# Altium PCB weather station SCH.PcbDoc
Units mm, origin at the board's own origin, x right, y up, seen from the top; angles counter-clockwise.
Board outline 52 x 23 mm, 2 copper layers (Top Layer, Bottom Layer), stack 1.571 mm thick; 37 components, 21 nets, 157 pads, 36 vias.
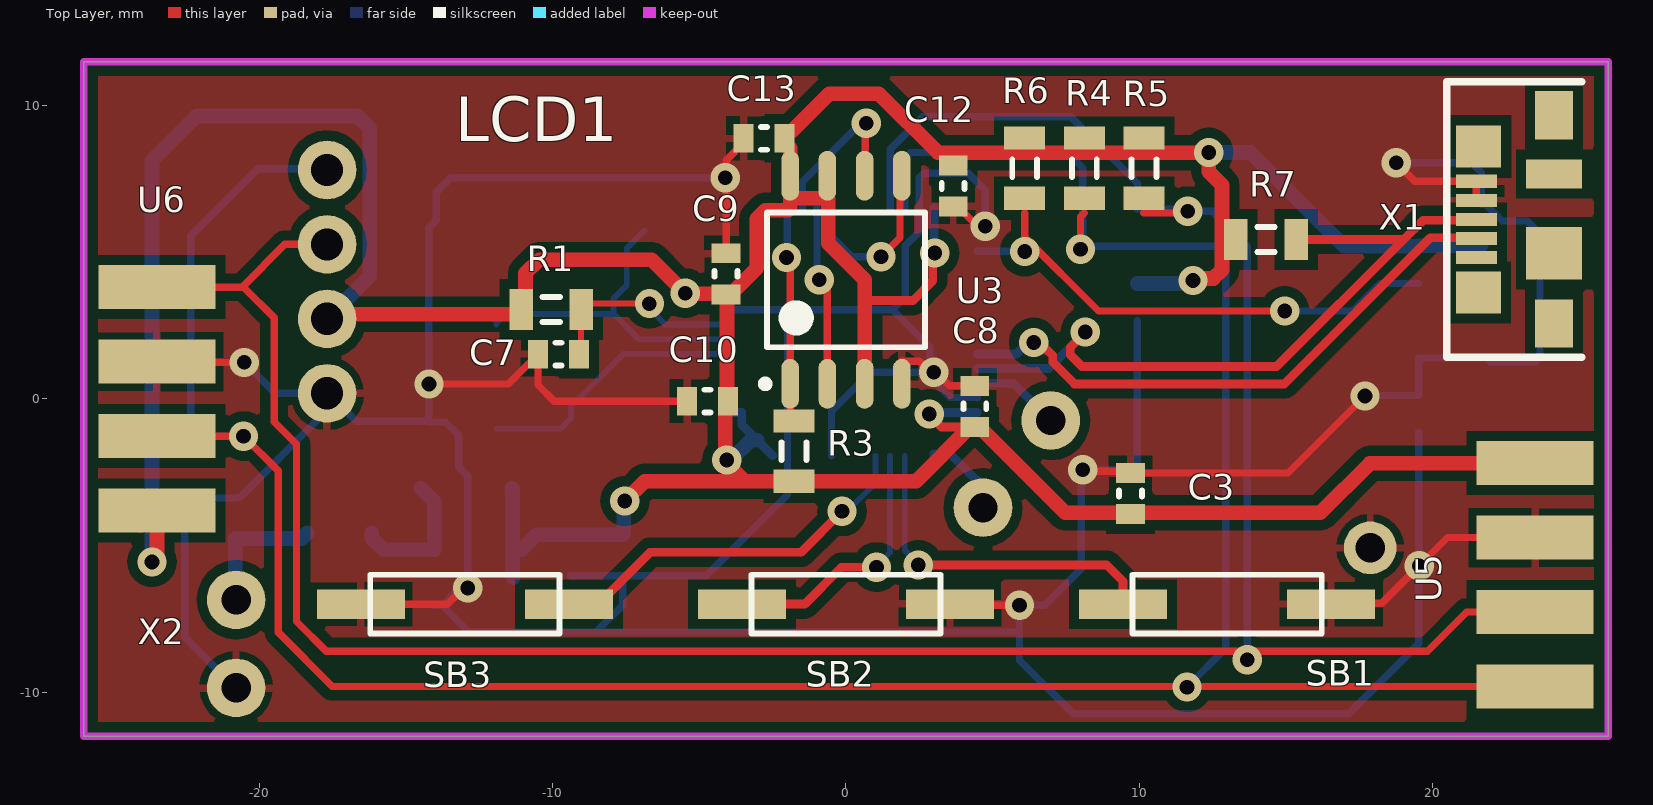
[diagram p0: Top Layer view]
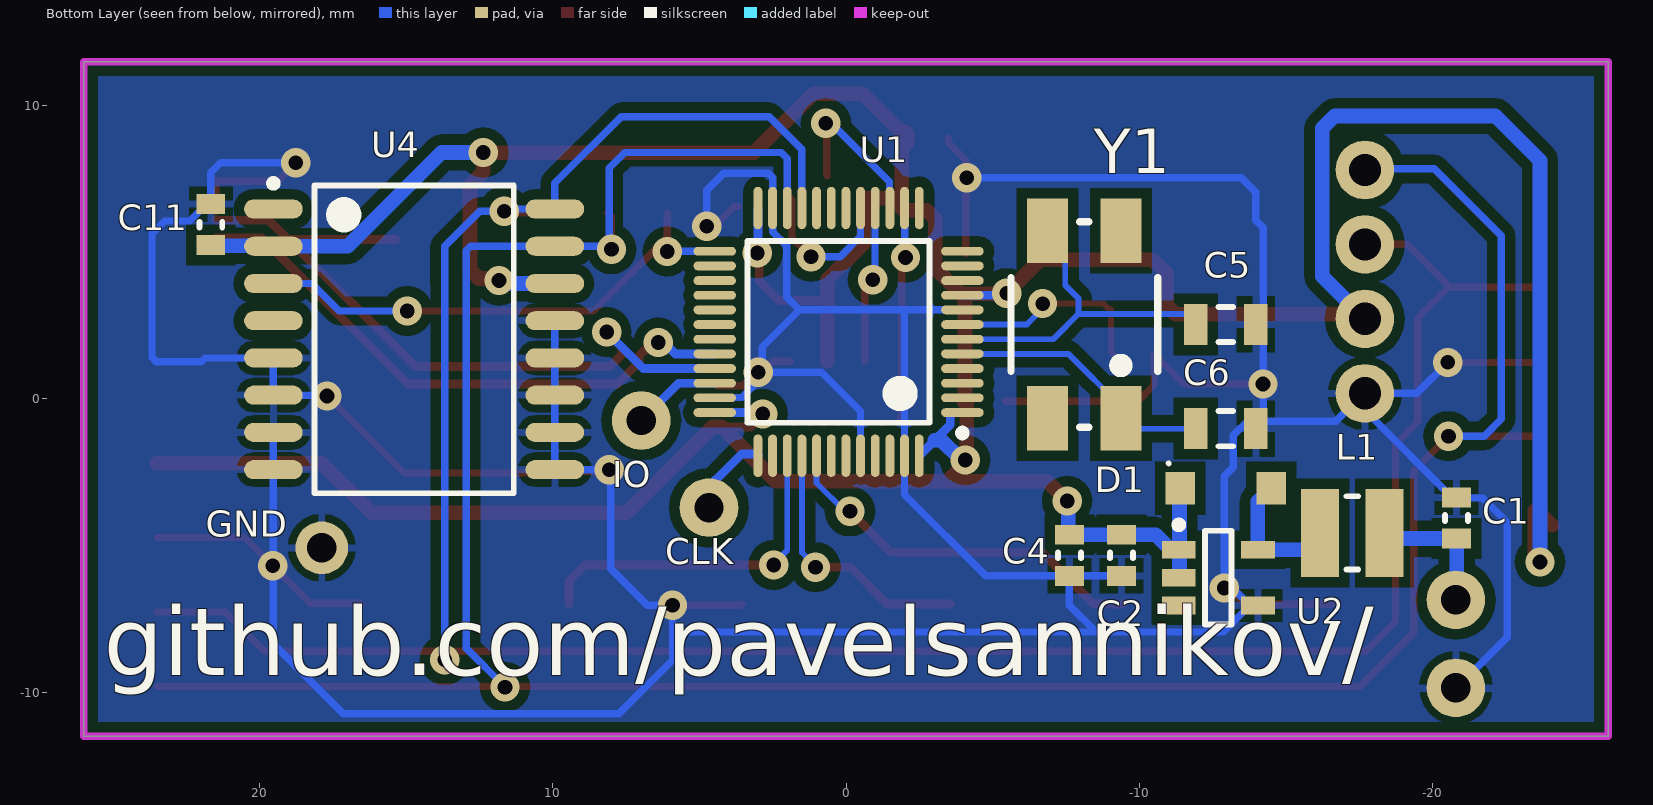
[diagram p1: Bottom Layer view, seen from below]
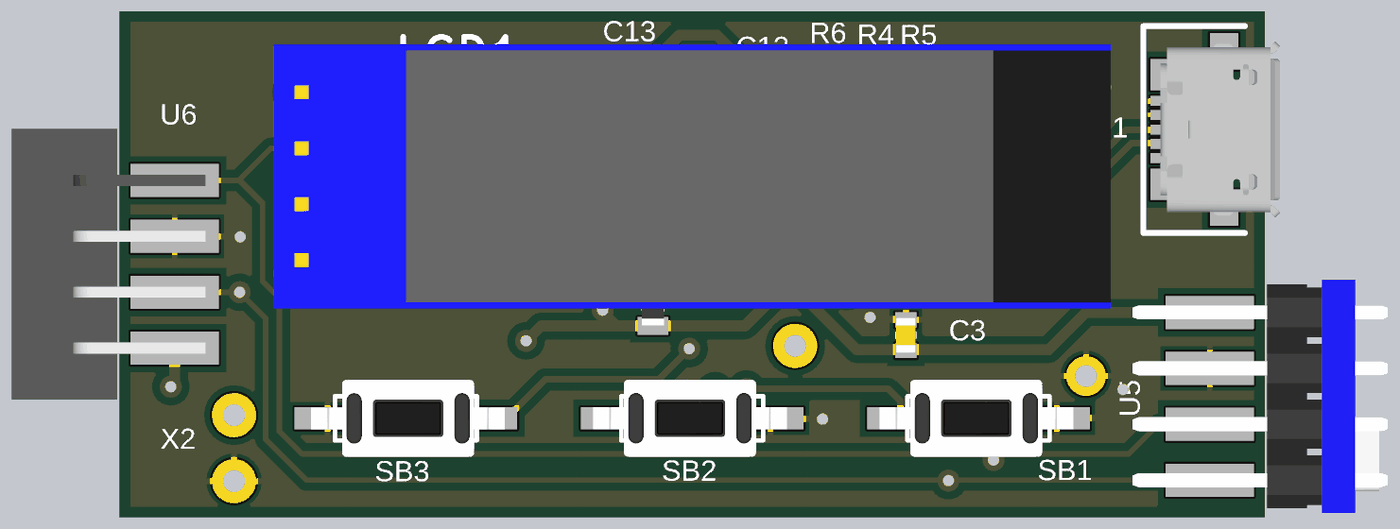
[diagram p2: 3D render of the assembled board from above, using the file's embedded part models]
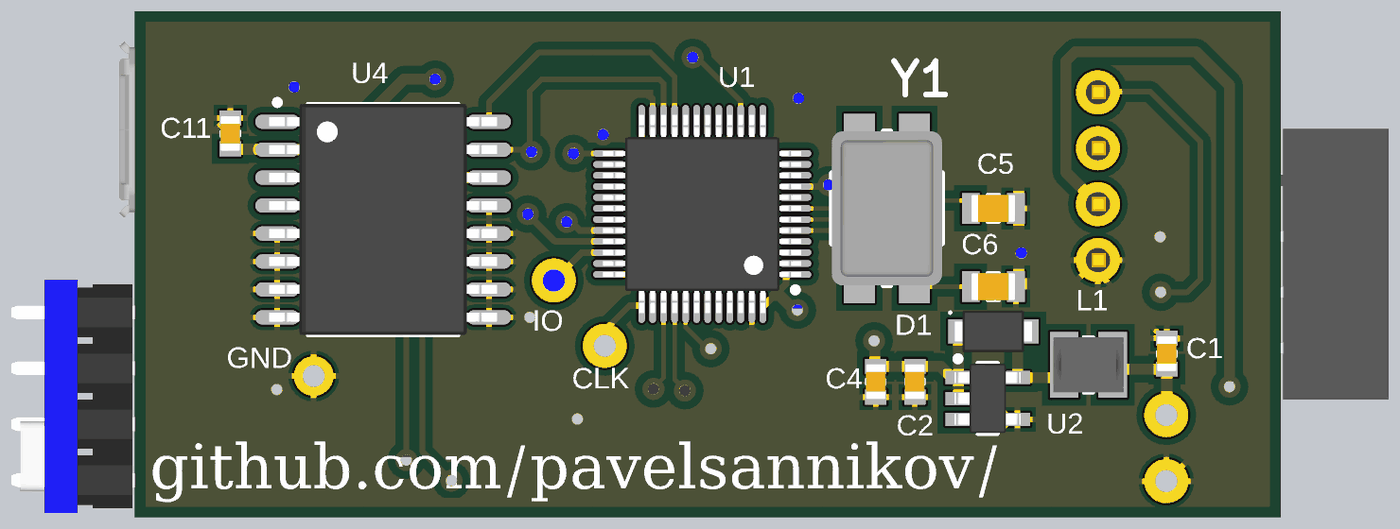
[diagram p3: 3D render of the assembled board from below, using the file's embedded part models]

## Layer stack, top to bottom
Top Solder: solder mask 0.0102, Solder Resist, Dk 3.5
Top Layer: signal copper 0.0356
Dielectric 1: dielectric 1.5, FR-4, Dk 4.8
Bottom Layer: signal copper 0.0356
Bottom Solder: solder mask 0.0102, Solder Resist, Dk 3.5

## Board outline
-26,-11.5 -26,11.5 26,11.5 26,-11.5

## Design rules (kind name [scope] priority, off if disabled: settings)
Clearance [IsRegion] p1: gap=0.35 ignorepadtopadclearanceinfootprint=FALSE
Clearance Clearance_1 [All] p2: gap=0.2 ignorepadtopadclearanceinfootprint=FALSE
DiffPairsRouting [All] p1: maxlimit=0.3 minlimit=0.2 mostfreqgap=0.3 toplayer_minwidth=0.2 toplayer_maxwidth=0.381 toplayer_prefwidth=0.3 bottomlayer_minwidth=0.2 bottomlayer_maxwidth=0.381 bottomlayer_prefwidth=0.3 maxuncoupledlength=12.7
PlaneConnect [All] p1: pad.planeconnectstyle=Relief pad.reliefexpansion=0.508 pad.reliefentries=4 pad.reliefconductorwidth=0.254 pad.reliefairgap=0.254 via.planeconnectstyle=Direct via.reliefexpansion=0.508 via.reliefentries=4 via.reliefconductorwidth=0.254 via.reliefairgap=0.254
PolygonConnect [All] p1: thpad.connectstyle=Relief thpad.reliefconductorwidth=0.254 thpad.reliefentries=4 thpad.polygonreliefangle="90 Angle" thpad.airgapwidth=0.254 smdpad.connectstyle=Relief smdpad.reliefconductorwidth=0.254 smdpad.reliefentries=4 smdpad.polygonreliefangle="90 Angle" smdpad.airgapwidth=0.254 via.connectstyle=Direct via.reliefconductorwidth=0.254 via.reliefentries=4 via.polygonreliefangle="90 Angle" via.airgapwidth=0.254
RoomDefinition "weather station PCB" [InComponentClass('weather station PCB')] p1 off: confinementstyle=ConfineIn formatcopy=TRUE lockcomponents=FALSE outline -57.318,-18.383 104.785,-18.383 104.785,16.059 -57.318,16.059
RoutingVias [All] p1: holewidth=0.711 width=1.27 viastyle="Through Hole" minholewidth=0.5 minwidth=1 maxholewidth=0.711 maxwidth=1.27
SolderMaskExpansion [All] p1: expansion=0.102 istentingtop=FALSE
Width [All] p1: maxlimit=2 minlimit=0.2 preferedwidth=0.254
28 further rules are at their usual default settings.

## Classes and differential pairs
differential pair USB: +USB_P -USB_N

## Components (designator, comment, footprint, x,y, rotation, side; value= is the part's Value field where it differs from the comment)
C1 "Capacitor" C0603 -20.828,-4.064 r270 bottom value="22 uF"
C2 "Capacitor" C0603 -9.398,-5.334 r90 bottom value="22 uF"
C3 "Capacitor" C0603 9.703,-3.226 r270 top value="22 uF"
C4 "Capacitor" C0603 -7.62,-5.334 r90 bottom value="22 uF"
C5 "Capacitor" C0805 -12.954,2.54 r0 bottom value=20pF
C6 "Capacitor" C0805 -12.954,-1.016 r0 bottom value=20pF
C7 "Capacitor" C0603 -9.804,1.524 r0 top value="0.1 uF"
C8 "Capacitor" C0603 4.394,-0.254 r270 top value="0.1 uF"
C9 "Capacitor" C0603 -4.089,4.267 r270 top value="0.1 uF"
C10 "Capacitor" C0603 -4.724,-0.076 r0 top value="0.1 uF"
C11 "Capacitor" C0603 21.666,5.944 r270 bottom value="0.1 uF"
C12 "Capacitor" C0603 3.658,7.264 r90 top value="0.1 uF"
C13 "Capacitor" C0603 -2.794,8.89 r0 top value="0.1 uF"
CLK "Connector" "1 Hole"#1 4.674,-3.708 r90 bottom
D1 "Diode" SOD123 -12.954,-3.048 r180 bottom
GND "Connector" "1 Hole"#2 17.882,-5.08 r90 bottom
IO "Connector" "1 Hole"#1 6.985,-0.737 r90 bottom
L1 "Inductor" LQH32CN -17.272,-4.572 r0 bottom value="47 uH"
LCD1 "LCD Display" "LCD 0.91inch module" 0,4 r0 top
R1 "Resistor" R0805 -10.058,3.048 r180 top value=10k
R3 "Resistor" R0805 -1.778,-1.778 r270 top value=10k
R4 "Resistor" R0805 8.128,7.874 r90 top value=10k
R5 "Resistor" R0805 10.16,7.874 r90 top value=10k
R6 "Resistor" R0805 6.096,7.874 r90 top value=10k
R7 "Resistor" R0805 14.326,5.436 r180 top value=10k
SB1 "Tact Switch" "Button SMD" 13,-7 r0 top
SB2 "Tact Switch" "Button SMD" 0,-7 r0 top
SB3 "Tact Switch" "Button SMD" -13,-7 r180 top
U1 "STM32F103C8" LQFP-48 0.254,2.286 r0 bottom
U2 "NCP1402" SOT-23-5 -12.7,-6.096 r180 bottom
U3 "Flash memory" SOIC-8 0,4.064 r90 top
U4 "DS3231" SOIC_W16 14.732,2.032 r180 bottom
U5 "Pressure sensor" "BMP180 rotated" 26,-6 r0 top
U6 "AM2320" "AM2320 BENDED" -26,0 r180 top
X1 "Connector" "Micro USB" 21.5,6.121 r90 top
X2 "Connector" "2 Holes" -23.58,-6.81 r180 top
Y1 "Crystal Oscillator" "KX - 13" -8.128,2.54 r90 bottom value="25 MHz"

## Footprints (in the part's own frame and the unit in brackets; to place one, negate y for a bottom-side part, rotate by r counter-clockwise, add the part's x,y. Pads: shape width x height; smd on the part's side, far side on the other; paste and mask are expansions set on the pad)
"1 Hole"#1 [mm] "1mm"
  round 2 hole 1: 1(0,0)
"1 Hole"#2 [mm] "1mm"
  round 1.8 hole 1: 1(0,0)
"2 Holes" [mm]
  round 2 hole 1: 1(-2.777,0.045) 2(-2.777,3.045)
"AM2320 BENDED" [mm]
  rect 4x1.5 smd: GND(-2.5,-1.27) SCL(-2.5,-3.81) SDA(-2.5,1.27) VDD(-2.5,3.81)
  body extent -3.9,-6.15 4.9,6.15, height 0.3
"BMP180 rotated" [mm]
  rect 4x1.5 smd: GND(-2.5,1.27) SCL(-2.5,-1.27) SDA(-2.5,-3.81) VIN(-2.5,3.81)
  body extent -6,-5.3 5.6,5.3, height 1.6
"Button SMD" [mm]
  rect 3x1 smd: 1(-3.55,0) 2(3.55,0)
  silkscreen extent -3.23,-1 3.23,1, body extent -4.5,-1.75 4.3,1.75, height 4.3
C0603 [mm] "Chip Capacitor, 2-Leads, Body 1,55x0,85mm, IPC Medium Density"
  rect 0.68x0.98 smd: 1(-0.7,0) 2(0.7,0)
  silkscreen extent -0.1,-0.39 0.1,0.39, body extent -0.8,-0.45 0.8,0.45, height 0.5
C0805 [mm] "Chip Capacitor, 2-Leads, Body 2,00x1,25mm, IPC Medium Density"
  rect 0.8x1.4 smd: 1(-1.025,0) 2(1.025,0)
  silkscreen extent -0.25,-0.6 0.25,0.6, body extent -1,-0.63 1,0.63, height 0.5
"KX - 13" [mm]
  rect 2.2x1.4 smd: 1(-3.2,-1.25) 2(3.2,1.25) 3(3.2,-1.25) 4(-3.2,1.25)
  silkscreen extent -3.5,-2.5 3.5,2.5, body extent -3.5,-2.5 3.5,2.5, height 1.3
"LCD 0.91inch module" [mm]
  round 2 hole 1.1: 1(-17.7,3.81) 2(-17.7,1.27) 3(-17.7,-1.27) 4(-17.7,-3.81)
  body extent -19,-6 19,6, height 5.7
LQFP-48 [mm] "TSQFP, 48-Leads, Body 7,00x7,00mm, Pitch 0,50mm, IPC Medium Density"
  oval 1.45x0.3 smd: 1(-4.225,2.75) 2(-4.225,2.25) 3(-4.225,1.75) 4(-4.225,1.25) 5(-4.225,0.75) 6(-4.225,0.25) 7(-4.225,-0.25) 8(-4.225,-0.75) 9(-4.225,-1.25) 10(-4.225,-1.75) 11(-4.225,-2.25) 12(-4.225,-2.75) 25(4.225,-2.75) 26(4.225,-2.25) 27(4.225,-1.75) 28(4.225,-1.25) 29(4.225,-0.75) 30(4.225,-0.25) 31(4.225,0.25) 32(4.225,0.75) 33(4.225,1.25) 34(4.225,1.75) 35(4.225,2.25) 36(4.225,2.75)
  oval 0.3x1.45 smd: 13(-2.75,-4.225) 14(-2.25,-4.225) 15(-1.75,-4.225) 16(-1.25,-4.225) 17(-0.75,-4.225) 18(-0.25,-4.225) 19(0.25,-4.225) 20(0.75,-4.225) 21(1.25,-4.225) 22(1.75,-4.225) 23(2.25,-4.225) 24(2.75,-4.225) 37(2.75,4.225) 38(2.25,4.225) 39(1.75,4.225) 40(1.25,4.225) 41(0.75,4.225) 42(0.25,4.225) 43(-0.25,4.225) 44(-0.75,4.225) 45(-1.25,4.225) 46(-1.75,4.225) 47(-2.25,4.225) 48(-2.75,4.225)
  silkscreen extent -4.35,-3.1 3.1,3.57, body extent -4.5,-4.5 4.5,4.5, height 1.6
LQH32CN [mm] "LQH32CN"
  rect 1.3x3 smd: 1(-1.1,0) 2(1.1,0)
  silkscreen extent -0.2,-1.25 0.2,1.25, body extent -1.6,-1.25 1.6,1.25, height 2
"Micro USB" [mm] "473460001, Molex"
  rect 1.65x1.3 smd: 0(-3.55,-2.65) 0(3.55,-2.65)
  rect 1.425x1.55 smd: 0(-2.49,-0.075) 0(2.49,-0.075)
  rect 1.8x1.9 smd: 0(-1.15,-2.65)
  rect 1x1.9 smd: 0(1.55,-2.65)
  rect 0.45x1.4 smd: 1(-1.3,0) 2(-0.65,0) 3(0,0) 4(0.65,0) 5(1.3,0)
  silkscreen extent -4.7,-3.6 4.7,1.02, body extent -3.99,-5.19 3.99,0.24, height 2.72
R0805 [mm]
  rect 0.8x1.4 smd: 1(-1.025,0) 2(1.025,0)
  silkscreen extent -0.3,-0.43 0.3,0.43, body extent -1,-0.5 1,0.5, height 0.5
SOD123 [mm] "SOD, 2-Leads, Body 1,70x3,50mm, IPC Medium Density"
  rect 1x1.1 smd: A(1.55,0) K(-1.55,0)
  silkscreen extent -2,0.8 -1.9,0.9, body extent -1.75,-0.95 1.75,0.95, height 1.1
SOIC-8 [mm] "SOIC, 8-Leads, Body 5,28x5,28mm, Pitch 1,27mm, IPC Medium Density"
  oval 1.7x0.6 smd: 1(-3.55,1.905) 2(-3.55,0.635) 3(-3.55,-0.635) 4(-3.55,-1.905) 5(3.55,-1.905) 6(3.55,-0.635) 7(3.55,0.635) 8(3.55,1.905)
  silkscreen extent -3.67,-2.7 2.3,2.88, body extent -3.95,-2.7 3.95,2.7, height 2.16
SOIC_W16 [mm] "SOP, 16-Leads, Body 10,30x7,50mm, Pitch 1,27mm, IPC Medium Density"
  oval 2x0.65 smd: 1(-4.8,4.445) 2(-4.8,3.175) 3(-4.8,1.905) 4(-4.8,0.635) 5(-4.8,-0.635) 6(-4.8,-1.905) 7(-4.8,-3.175) 8(-4.8,-4.445) 9(4.8,-4.445) 10(4.8,-3.175) 11(4.8,-1.905) 12(4.8,-0.635) 13(4.8,0.635) 14(4.8,1.905) 15(4.8,3.175) 16(4.8,4.445)
  silkscreen extent -4.93,-5.25 3.4,5.44, body extent -5.16,-5.25 5.16,5.25, height 2.65
SOT-23-5 [mm]
  rect 1.15x0.6 smd: 1(-1.35,0.95) 2(-1.35,0) 3(-1.35,-0.95) 4(1.35,-0.95) 5(1.35,0.95)
  silkscreen extent -1.48,-1.6 0.45,1.92, body extent -1.5,-1.58 1.5,1.58, height 1

## Part data
C1 C2 C3 C4 C5 C6 C7 C8 C9 C10 C11 C12 C13: "Capacitor non-polar", Package=0805, Voltage=50V, Isolation type=X7R, Precision=5%
CLK GND IO: library part "Connector 1"
D1: Part Number=PMEG2010ER,115
L1: "Coil Inductor", Current="170 mA", Part Number=B82472G6154M, URL=https://www.tdk-electronics.tdk.com/inf/30/db/ind_2008/b82464g4.pdf, Изготовитель="EPCOS /  TDK"
LCD1: library part "Display LCD 0.91"
R1 R3 R4 R5 R6 R7: Package=0805, Precision=1%
SB1 SB2 SB3: library part Button, Part Number=KLS7-TS6601-11-180
U1: library part STM32F100C4, "Microcontroller", Part Number=STM32F103C8
U2: "DC/DC Converter"
U3: library part W25Q32FVSSIG, Part Number=W25Q32FVSSIG
U5: library part BMP180, Part Number=BMP180
U6: "Temperature/Humadity Module", Part Number=AM2320
X1: library part Micro/MiniUSB
X2: library part "Connector 2", Part Number=15EDGRM-3.81-02P

## Via types
v1: diameter 1, hole 0.5, Top Layer to Bottom Layer, tented both sides, 36 vias

## Nets (pads, with @x,y where several pads share a name; then routed paths per layer and width w, separated by ;. In a path a pad name is that pad's centre, name@x,y a point inside that pad or via, vN(x,y) a via of type N, cw(c..) or ccw(c..) an arc to the next point about the centre after c; other vN are vias at no path point)
CLK: U1.15 U3.6 | length 5.7
  Top Layer w0.25: U3.6 0.66,7.639 0.66,9.373 v1(0.686,9.398)
  Bottom Layer w0.25: U1.15 -1.486,6.521 -1.486,7.404 0.508,9.398 v1(0.686,9.398)
GND: C1.1 C2.1 C3.1 C4.1 C5.1 C6.1 C7.1 C8.1 C9.1 C10.1 C11.1 C12.1 C13.1 GND.1 LCD1.4 SB1.2 SB2.2 SB3.2 U1.8 U1.23 U1.35 U1.44 U1.47 U2.4 U3.4 U4.5 U4.6 U4.7 U4.8 U4.9 U4.10 U4.11 U4.12 U4.13 U5.GND U6.GND X1.4 X1.5 X2.2 | length 214.2
  Top Layer w0.25: U6.GND -23.475,1.245 v1(-20.523,1.245) ; SB3.2 -13.592,-7 -13.044,-6.452 v1(-12.903,-6.452) ; v1(-14.224,0.508) -11.52,0.508 C7.1 -10.504,0.471 -9.957,-0.076 C10.1 ; C9.1 -4.089,8.145 -3.494,8.74 C13.1 ; U3.4@1.905,1.289 2.504,1.289 2.879,0.914 v1(2.997,0.914) 3.061,0.914 3.529,0.446 C8.1 ; SB2.2 3.586,-7.036 v1(5.918,-7.036) ; C12.1 3.808,6.564 4.336,6.036 4.606,6.036 v1(4.75,5.893) ; v1(8.077,-2.413) 8.134,-2.469 9.646,-2.469 C3.1 15.076,-2.526 v1(17.704,0.102) ; SB1.2 16.581,-6.969 18.279,-6.969 20.518,-4.73 U5.GND ; v1(18.771,8.052) 19.401,7.421 X1.5 X1.4
  Bottom Layer w0.25: X2.2 -20.831,-9.855 -22.555,-8.131 -22.555,-4.216 -21.717,-3.378 -20.842,-3.378 C1.1 -20.678,-3.364 -20.463,-3.149 -18.035,-0.721 -18.035,-0.145 LCD1.4 ; v1(-20.523,1.245) -19.469,0.19 LCD1.4 ; U2.4 U2.4@-13.775,-7.046 ; C2.1 C4.1 ; v1(-4.115,7.544) -13.487,7.544 -13.979,7.052 -13.979,6.096 -14.233,5.842 C6.1@-14.233,-0.762 ; U1.8 -1.88,3.036 ; U1.44 -0.496,-0.42 0.838,0.914 v1(2.997,0.914) ; U1.35 4.469,0.046 3.561,0.046 2.997,0.61 v1(2.997,0.914) ; v1(4.75,5.893) 4.75,7.112 4.166,7.696 2.641,7.696 2.494,7.55 2.494,5.695 2.019,5.219 2.019,3.468 1.587,3.036 ; U4.13 U4.12 U4.11 U4.10 U4.9 v1(8.077,-2.413) 8.026,-2.464 8.026,-5.791 6.782,-7.036 v1(5.918,-7.036) 5.918,-7.976 ; v1(17.704,0.102) 17.716,0.114 19.519,0.114 U4.6 U4.5 21.857,1.397 21.984,1.27 23.526,1.27 23.673,1.416 23.673,5.639 23.241,6.071 22.389,6.071 21.816,6.644 C11.1 21.666,7.722 21.336,8.052 v1(18.771,8.052) ; U4.7 U4.8 19.532,-8.357 17.145,-10.744 7.747,-10.744 5.918,-8.915 5.918,-7.976 ; LCD1.4 -17.659,0.19 -16.707,-0.762 C6.1@-14.233,-0.762 ; C6.1@-14.233,-0.762 -14.208,-0.787 -13.665,-0.787 -13.208,-1.245 -13.208,-2.337 -12.903,-2.642 v1(-12.903,-6.452) -13.047,-6.595 -13.324,-6.595 U2.4@-13.775,-7.046 ; U2.4@-13.775,-7.046 -12.871,-7.95 -8.534,-7.95 ; -8.534,-7.95 5.893,-7.95 5.918,-7.976 ; -8.534,-7.95 -7.62,-7.036 C4.1 ; C4.1 -4.764,-6.034 -1.996,-3.266 U1.47 -1.996,2.92 -1.88,3.036 ; -1.88,3.036 1.587,3.036 ; 1.587,3.036 2.854,1.769 2.854,1.058 v1(2.997,0.914)
  other v1: 19.558,-5.69
MISO: U1.16 U3.2 | length 5.4
  Top Layer w0.25: v1(-0.914,4.064) -0.635,3.785 U3.2@-0.635,1.289
  Bottom Layer w0.25: U1.16 -0.986,6.501 -0.986,4.136 v1(-0.914,4.064)
MOSI: U1.17 U3.5 | length 5.2
  Top Layer w0.25: v1(1.194,4.851) 1.841,5.499 1.841,6.775 U3.5@1.905,6.839
  Bottom Layer w0.25: U1.17 -0.496,5.547 0.2,4.851 v1(1.194,4.851)
NetC5_2: C5.2 U1.6 Y1.2 | length 11.8
  Bottom Layer w0.2: C5.2 -11.929,2.596 -11.629,2.896 -7.925,2.896 ; Y1.2 -7.478,5.14 -7.478,3.876 -7.925,3.429 -7.925,2.896 ; U1.6 -7.065,2.036 -7.925,2.896
NetC6_2: C6.2 U1.5 Y1.1 | length 9.2
  Bottom Layer w0.2: C6.2 -9.734,-1.016 Y1.1 -9.378,-0.26 -7.582,1.536 U1.5
NetC7_2: C7.2 R1.1 U1.7 | length 7.4
  Top Layer w0.2: C7.2 -9.033,1.595 R1.1 -9.008,3.023 -8.779,3.251 v1(-6.706,3.251)
  Bottom Layer w0.2: v1(-6.706,3.251) -6.883,3.251 -6.168,2.536 U1.7
NetD1_A: D1.A L1.2 U2.5 | length 4.7
  Bottom Layer w0.5: L1.2 -16.172,-4.746 -15.772,-5.146 U2.5 -14.05,-3.502 D1.A
NetR6_1: R6.1 U1.25 U4.3 | length 17.3
  Top Layer w0.25: 6.096,6.341 6.096,5.515 8.613,2.997 v1(14.961,2.997)
  Bottom Layer w0.25: U1.25 4.482,5.033 6.093,5.033 v1(6.096,5.029) ; v1(14.961,2.997) 17.281,2.997 18.221,3.937 U4.3
NetSB1_1: SB1.1 U1.39 | length 11.9
  Top Layer w0.3: v1(2.464,-5.664) 8.893,-5.664 9.45,-6.221 SB1.1
  Bottom Layer w0.2: U1.39 2.004,-5.158 2.464,-5.618 v1(2.464,-5.664)
NetSB2_1: SB2.1 U1.40 | length 9.1
  Top Layer w0.3: SB2.1 -1.412,-7 -0.152,-5.74 v1(1.041,-5.74)
  Bottom Layer w0.2: v1(1.041,-5.74) 1.041,-5.7 1.504,-5.237 U1.40
NetSB3_1: SB3.1 U1.41 | length 13.1
  Top Layer w0.3: SB3.1 -8.45,-7 -6.682,-5.232 -1.531,-5.232 v1(-0.134,-3.835)
  Bottom Layer w0.2: v1(-0.134,-3.835) 0.036,-3.835 1.004,-2.868 U1.41
NSS: R3.1 U1.14 U3.1 | length 7.4
  Top Layer w0.25: v1(-2.032,4.826) -1.905,4.699 -1.905,1.289 -1.905,-0.626 R3.1
  Bottom Layer w0.25: v1(-2.032,4.826) -2.006,4.852 -2.006,6.501 U1.14
SCL: LCD1.2 R5.1 U1.21 U4.16 U5.SCL U6.SCL | length 94.7
  Top Layer w0.25: U6.SCL -23.146,3.81 -22.793,3.81 -22.439,3.81 -22.25,3.81 -20.599,3.81 -19.139,5.27 LCD1.2 ; -20.549,3.81 -19.507,2.769 -19.507,-0.787 -18.745,-1.549 -18.745,-7.595 -17.729,-8.611 12.7,-8.611 v1@13.682,-8.611 ; 10.16,6.341 11.593,6.341 v1(11.653,6.401) ; v1(13.682,-8.898) v1@13.682,-8.611 ; U5.SCL 21.178,-7.27 19.837,-8.611 v1@13.682,-8.611
  Bottom Layer w0.25: U1.21 1.504,8.514 2.616,9.627 7.671,9.627 9.932,7.365 U4.16 v1@11.653,6.477 ; v1(11.653,6.401) 12.497,6.401 13.691,5.207 13.691,3.912 13.682,3.903 v1(13.682,-8.898)
SDA: LCD1.1 R4.1 U1.22 U4.15 U5.SDA U6.SDA | length 100
  Top Layer w0.25: U6.SDA v1(-20.549,-1.27) -19.368,-2.45 -19.368,-7.962 -17.52,-9.81 11.633,-9.81 U5.SDA ; v1(8.001,5.105) 8.001,6.214 8.128,6.341
  Bottom Layer w0.25: v1(-20.549,-1.27) -21.768,-1.27 -22.352,-0.686 -22.352,5.563 -20.066,7.849 -17.739,7.849 LCD1.1 ; U1.22 2.004,8.202 2.21,8.407 7.544,8.407 8.077,7.874 8.077,5.353 8.224,5.207 U4.15 12.808,5.207 12.954,5.061 12.954,-8.509 v1(11.633,-9.83)
SWDCLK: CLK.1 U1.37 | length 2.9
  Bottom Layer w0.3: U1.37 3.004,-1.88 3.556,-1.88 CLK.1@5.207,-3.531
SWDIO: IO.1 U1.34 | length 3
  Bottom Layer w0.3: U1.34 5.712,0.536 IO.1
USB_N: U1.32 X1.2 | length 20
  Top Layer w0.3: v1(6.401,1.927) 6.59,1.927 6.861,1.656 6.874,1.656 7.049,1.48 7.049,1.258 7.799,0.508 14.944,0.508 19.932,5.496 21.475,5.496 X1.2
  Bottom Layer w0.3: U1.32 5.821,1.536 6.211,1.927 v1(6.401,1.927)
USB_P: R7.1 U1.33 X1.3 | length 25
  Top Layer w0.3: v1(8.163,2.281) 8.163,2.269 7.649,1.755 7.649,1.506 8.048,1.108 14.695,1.108 19.023,5.436 ; R7.1 19.023,5.436 ; X1.3 21.475,6.096 19.684,6.096 19.023,5.436
  Bottom Layer w0.3: U1.33 6.919,1.036 v1(8.163,2.281)
VBAT: C1.2 L1.1 X2.1 | length 4.6
  Bottom Layer w0.5: X2.1@-20.828,-6.858 C1.2 -18.564,-4.764 L1.1
VCC: C2.2 C3.2 C4.2 C8.2 C9.2 C10.2 C11.2 C12.2 C13.2 D1.K LCD1.3 R1.2 R3.2 R4.2 R5.2 R6.2 R7.2 U1.1 U1.9 U1.24 U1.36 U1.48 U2.1 U2.2 U3.3 U3.7 U3.8 U4.2 U4.14 U5.VIN U6.VDD | length 157.9
  Top Layer w0.3: 0.635,3.378 0.66,3.353 2.286,3.353 2.962,4.028 2.962,4.917 v1(3.023,4.978) ; v1@2.806,-0.508 v1@2.812,-0.514 ; v1(2.841,-0.514) v1@2.812,-0.514 ; C8.2 4.244,-0.954 3.252,-0.954 v1@2.812,-0.514
  Top Layer w0.5: U6.VDD@-24.079,-4.31 -23.579,-3.81 U6.VDD -23.5,-5.39 v1(-23.673,-5.563) ; LCD1.3 -17.541,2.889 -11.233,2.889 -11.083,3.039 R1.2 -10.933,3.198 -10.933,4.281 -10.465,4.75 -6.629,4.75 v1(-5.486,3.607) -5.467,3.587 -4.109,3.587 C9.2 ; v1(-7.544,-3.48) -6.867,-2.803 -3.445,-2.803 ; -4.115,-1.317 -4.115,-2.134 -3.445,-2.803 ; -4.114,-1.316 -4.114,-0.166 C10.2 -4.057,-0.044 -4.057,3.535 C9.2 ; U3.3@0.635,1.289 0.635,3.378 0.635,4.067 -0.606,5.308 -0.606,6.81 -0.635,6.839 U3.8@-1.905,6.839 ; C8.2@4.244,-0.954 2.395,-2.803 R3.2 -3.445,-2.803 ; C8.2 4.544,-0.954 7.476,-3.886 16.18,-3.886 17.876,-2.19 U5.VIN ; v1(11.836,4.039) 11.906,4.109 12.534,4.109 12.827,4.402 12.827,7.29 12.37,7.747 v1(12.37,8.407) 12.353,8.391 3.141,8.391 1.118,10.414 -0.57,10.414 -1.854,9.13 -2.004,9.13 -2.094,9.04 C13.2 -2.094,8.74 -1.905,8.551 U3.8 U3.8@-1.905,6.839 ; C9.2 -3.939,3.567 -3.048,4.459 -3.048,6.147 -2.755,6.44 -1.974,6.44 -1.905,6.509 U3.8@-1.905,6.839
  Bottom Layer w0.3: v1(-5.486,3.607) -5.416,3.536 U1.9 ; U1.1 -3.559,-0.464 -3.559,-0.876 -3.028,-1.407 U1.48 ; v1(2.841,-0.514) 2.891,-0.464 U1.36 ; U1.24 3.004,4.997 v1(3.023,4.978)
  Bottom Layer w0.5: v1(-23.673,-5.563) -23.673,8.128 -22.149,9.652 -16.676,9.652 -16.25,9.226 -16.25,4.18 LCD1.3 ; D1.K -11.377,-3.075 U2.1@-11.377,-5.146 ; U2.2 -11.377,-6.069 U2.1@-11.377,-5.146 ; v1(-7.544,-3.48) -7.582,-3.518 -7.582,-4.596 C4.2 C2.2 -10.563,-4.634 -11.075,-5.146 U2.1 U2.1@-11.377,-5.146 ; v1(-4.064,-2.083) -3.929,-2.083 -3.253,-1.407 -3.028,-1.407 ; U4.14 11.735,3.937 v1(11.836,4.039) ; v1(12.37,8.407) 13.792,8.407 16.993,5.207 U4.2 19.55,5.225 21.648,5.225 C11.2
pads on no net: U1.2 U1.3 U1.4 U1.10 U1.11 U1.12 U1.13 U1.18 U1.19 U1.20 U1.26 U1.27 U1.28 U1.29 U1.30 U1.31 U1.38 U1.42 U1.43 U1.45 U1.46 U2.3 U4.1 U4.4 X1.0 X1.1 Y1.3 Y1.4

## Polygon pours and split planes (outlines as drawn)
GND on Top Layer "GND_L01_P000" (solid, remove dead copper, pour order 0): 26,11.5 -26,11.5 -26,-11.5 26,-11.5
GND on Bottom Layer "GND_L02_P001" (solid, remove dead copper, pour order 1): 26,11.5 -26,11.5 -26,-11.5 26,-11.5

## Keep-outs
Keep-Out Layer:
  the board outline again, w0.254

## Silkscreen, mask and mechanical layers (free items; w line width, h text height)
Bottom Overlay:
  text "github.com/pavelsannikov/" at 25.324,-10.187 h4
Mechanical 2:
  the board outline again, w0.254
Border:
  the board outline again, w0.254